# Altium PCB PCB1.PcbDoc
Units mil, origin at the board's own origin, x right, y up, seen from the top; angles counter-clockwise.
Board outline 6000 x 4000 mil, 2 copper layers (Top Layer, Bottom Layer); 21 components, 18 nets, 53 pads, 0 vias.
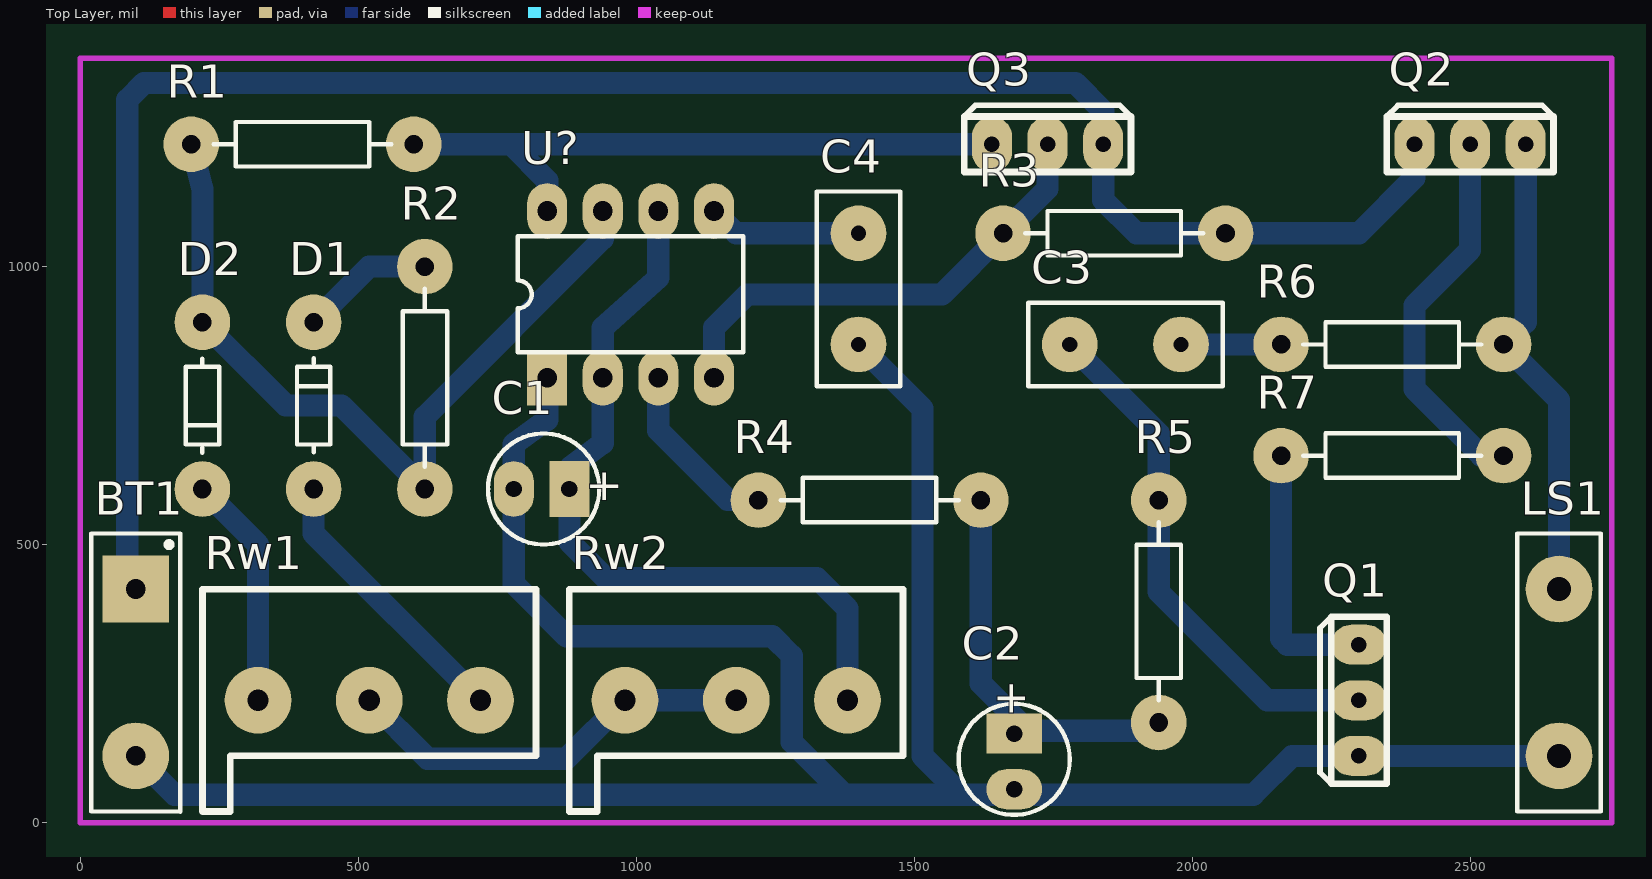
[diagram p0: Top Layer view]
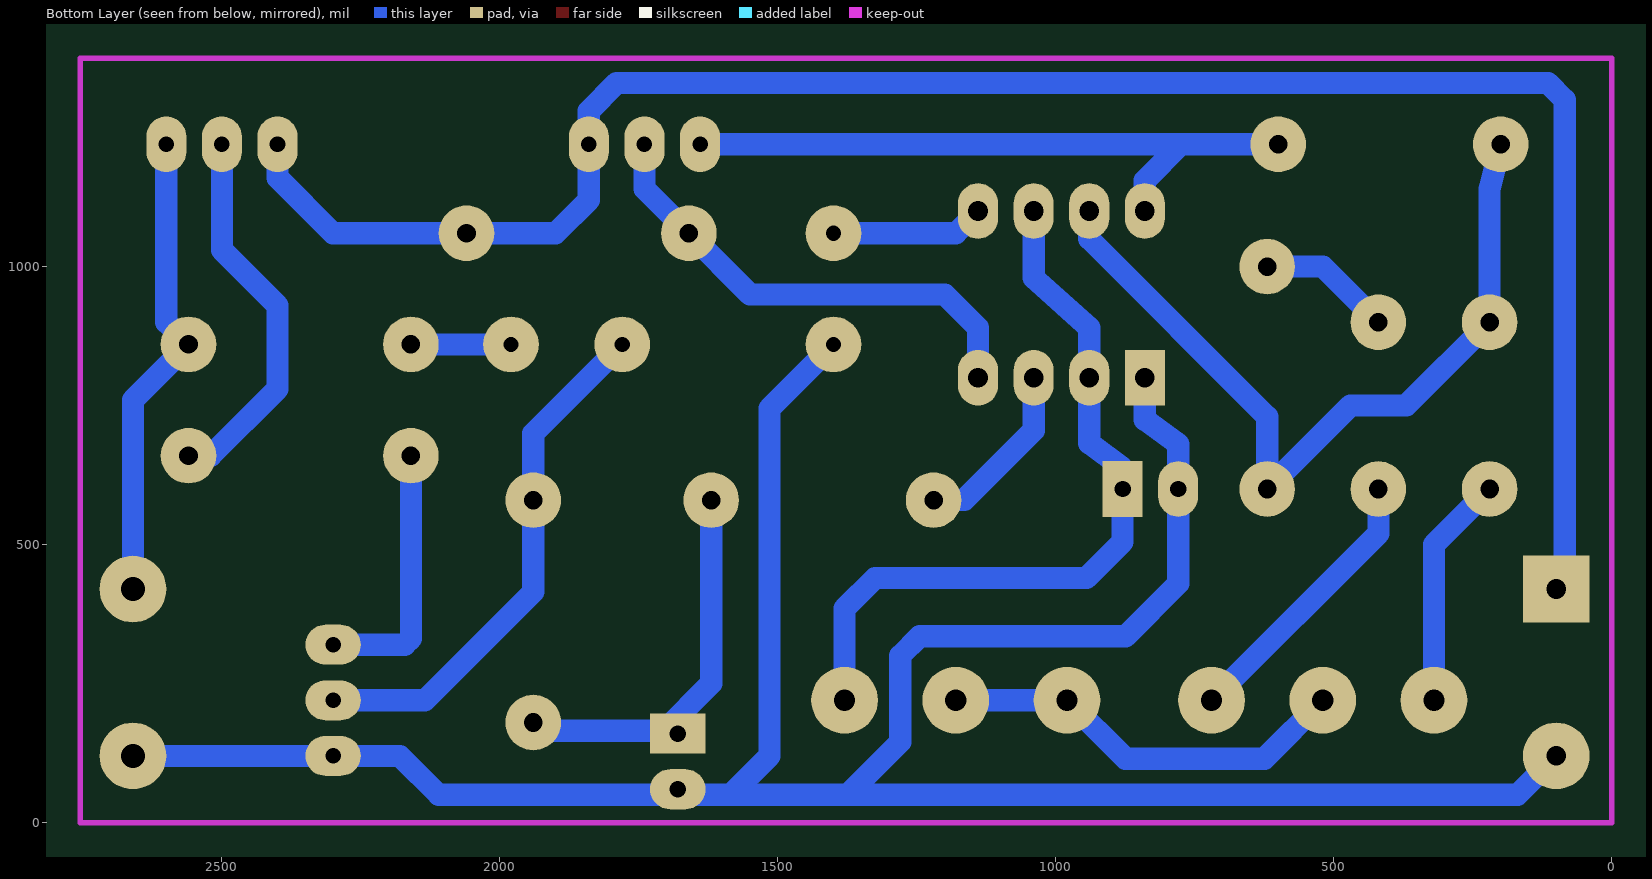
[diagram p1: Bottom Layer view, seen from below]

## Layer stack, top to bottom
Top Layer: signal copper 1.4
Dielectric: dielectric 12.6, FR-4, Dk 4.8
Bottom Layer: signal copper 1.4

## Board outline
-1100,-1295 4900,-1295 4900,2705 -1100,2705

## Design rules (kind name [scope] priority, off if disabled: settings)
Clearance [All] p1: gap=10
ComponentClearance [All] p1: gap=10 collisioncheckmode=3 verticalgap=10
PolygonConnect [All] p1: connectstyle=Relief reliefconductorwidth=10 reliefentries=4 polygonreliefangle="90 Angle"
RoomDefinition Sheet1 [InComponentClass('Sheet1')] p1: confinementstyle=ConfineIn formatcopy=TRUE lockcomponents=FALSE outline -555,-1105 4300,-1105 4300,-375 -555,-375
RoutingLayers [All] p1: top layer_v5=FALSE bottom layer_v5=TRUE
RoutingVias [All] p1: holewidth=28 width=50 viastyle="Through Hole" minholewidth=28 minwidth=50 maxholewidth=28 maxwidth=50
SolderMaskExpansion [All] p1: expansion=4
TestPointUsage [All] p1: valid=0 allowmultiple=FALSE
Testpoint [All] p1: side=15 testpointundercomponent=TRUE minsize=40 maxsize=100 preferedsize=60 minholesize=0 maxholesize=40 preferedholesize=32 testpointgrid=1 style=1023 order=0-112345678
Width [All] p1: maxlimit=50 minlimit=30 preferedwidth=40
17 further rules are at their usual default settings.

## Components (designator, comment, footprint, x,y, rotation, side; value= is the part's Value field where it differs from the comment)
BT1 "Battery" BAT-2-D 100,420 r270 top
C1 "C" RAD-0.1-D 880,600 r180 top
C2 "C" RAD-0.1-D 1680,160 r270 top
C3 "Cap" RAD-0.2-D 1980,860 r180 top
C4 "Cap" RAD-0.2-D 1400,860 r90 top
D1 "IN4148" DIODE-0.3-D 420,600 r90 top
D2 "IN4148" DIODE-0.3-D 220,900 r270 top
LS1 "Speaker" SPEAKER-D 2660,420 r270 top
Q1 "9013" TO-126-D 2300,120 r90 top
Q2 "9012" TO-126-D 2400,1220 r0 top
Q3 "9013" TO-126-D 1640,1220 r0 top
R1 "R0.25w" AXIAL-0.4-D 400,1220 r0 top
R2 "R0.25w" AXIAL-0.4-D 620,800 r90 top
R3 "R0.25w" AXIAL-0.4-D 1860,1060 r0 top
R4 "R0.25w" AXIAL-0.4-D 1420,580 r0 top
R5 "R0.25w" AXIAL-0.4-D 1940,380 r90 top
R6 "R0.25w" AXIAL-0.4-D 2360,860 r0 top
R7 "R0.25w" AXIAL-0.4-D 2360,660 r0 top
Rw1 "Rw" VR6-D 320,220 r0 top
Rw2 "Rw" VR6-D 980,220 r0 top
U? "555" DIP-8-D 840,800 r0 top

## Footprints (in the part's own frame and the unit in brackets; to place one, negate y for a bottom-side part, rotate by r counter-clockwise, add the part's x,y. Pads: shape width x height; smd on the part's side, far side on the other; paste and mask are expansions set on the pad)
AXIAL-0.4-D [mm] "Resistor; 2 Leads; 100*100mil"
  round 2.54 hole 0.85: 1(-5.08,0) 2(5.08,0)
  silkscreen extent -4.06,-1.02 4.06,1.02
BAT-2-D [mil] "power; 2 Leads; 120*120mil"
  rect 120x120 hole 35.43: 1(0,0)
  round 120 hole 35.43: 2(300,0)
  silkscreen extent -100,-80 400,80
DIODE-0.3-D [mm] "Resistor; 2 Leads; 100*100mil"
  round 2.54 hole 0.85: 1(0,0) 2(7.62,0)
  silkscreen extent 1.68,-0.76 5.97,0.76
DIP-8-D [mil] "DIP; 8 Leads; 100*72mil"
  rect 72x100 hole 35.43: 1(0,0)
  oval 72x100 hole 35.43: 2(100,0) 3(200,0) 4(300,0) 5(300,300) 6(200,300) 7(100,300) 8(0,300)
  silkscreen extent -53,46 353,254
RAD-0.1-D [mil] "Capacitor, Electrolytic, Radial; 72*100mil"
  rect 72x100 hole 29.53: 1(0,0)
  oval 72x100 hole 29.53: 2(100,0)
  silkscreen extent -54,-100 146,100
RAD-0.2-D [mm] "Jumper Wire; 2 Leads; 100*100mil"
  round 2.54 hole 0.7: 1(0,0) 2(5.08,0)
  silkscreen extent -1.91,-1.91 6.98,1.91
SPEAKER-D [mil] "Circuit Breaker; 2 Leads; 120*120mil"
  round 120 hole 43.31: 1(0,0) 2(300,0)
  silkscreen extent -100,-75 400,75
TO-126-D [mil] "72*100mil"
  oval 72x100 hole 28: 1(0,0) 2(100,0) 3(200,0)
  silkscreen extent -50,-50 250,70
VR6-D [mil] "120*120mil"
  round 120 hole 38: 1(0,0) 2(200,0) 3(400,0)
  silkscreen extent -100,-200 500,200

## Part data
BT1: "Multicell Battery"
C1 C2: "Electrolytic Capacitor"
C3 C4: "Capacitor"
D1 D2: "Default Diode"
LS1: "Loudspeaker"
Q1 Q3: "NPN Transistor"
R1 R2 R3 R4 R5 R6 R7: "Resistor"
Rw1 Rw2: "Potentiometer"
U?: library part NE555

## Nets (pads, with @x,y where several pads share a name; then routed paths per layer and width w, separated by ;. In a path a pad name is that pad's centre, name@x,y a point inside that pad or via, vN(x,y) a via of type N, cw(c..) or ccw(c..) an arc to the next point about the centre after c; other vN are vias at no path point)
GND: BT1.2 C1.2 C2.2 C4.1 LS1.2 Q1.1 U?.1 | length 4748.2
  Bottom Layer w40: BT1.2 170,50 2110,50 2180,120 LS1.2 ; U?.1 840,724.67 780,680.67 780,430 875,335 1245,335 1280,300 1280,145 1375,50 ; C4.1 1515,745 1515,120 1585,50
NetBT1_1: BT1.1 Q2.1 Q3.3 R3.2 | length 3520.6
  Bottom Layer w40: BT1.1 85,435 85,1300 115,1330 1790,1330 1840,1280 1840,1120 1900,1060 2300,1060 2400,1160 Q2.1
NetC1_1: C1.1 Rw2.3 U?.2 U?.6 | length 1384.2
  Bottom Layer w40: U?.6 1040,980 940,890 940,682.5 880,637.5 880,505 945,440 1325,440 1380,385 Rw2.3
NetC2_1: C2.1 R4.2 R5.1 | length 691.4
  Bottom Layer w40: R4.2 1620,250 1705,165 1925,165 R5.1
NetC3_1: C3.1 R6.1 | length 180
  Bottom Layer w40: C3.1 R6.1
NetC3_2: C3.2 Q1.2 R5.2 | length 952
  Bottom Layer w40: C3.2 1940,700 1940,415 2135,220 Q1.2
NetC4_2: C4.2 U?.5 | length 276.6
  Bottom Layer w40: U?.5 1180,1060 C4.2
NetD1_1: D1.1 Rw1.3 | length 504.3
  Bottom Layer w40: D1.1 420,520 Rw1.3
NetD1_2: D1.2 R2.2 | length 241.4
  Bottom Layer w40: D1.2 520,1000 R2.2
NetD2_1: D2.1 R1.1 R2.1 U?.7 | length 1479.3
  Bottom Layer w40: R1.1 220,1140 D2.1 370,750 470,750 R2.1 620,730 940,1050 U?.7
NetD2_2: D2.2 Rw1.1 | length 421.4
  Bottom Layer w40: D2.2 320,500 Rw1.1
NetLS1_1: LS1.1 Q2.3 R6.2 | length 858
  Bottom Layer w40: Q2.3 2600,900 R6.2 2660,760 LS1.1
NetQ1_3: Q1.3 R7.1 | length 473.6
  Bottom Layer w40: R7.1 2160,331 2171,320 Q1.3
NetQ2_2: Q2.2 R7.2 | length 691.1
  Bottom Layer w40: Q2.2 2500,1030 2400,930 2400,780 2520,660 R7.2
NetQ3_1: Q3.1 R1.2 U?.8 | length 1211.9
  Bottom Layer w40: R1.2 1145,1220 ; 775,1220 840,1155 U?.8 ; 1134,1220 Q3.1 Q3.1@1640,1234
NetQ3_2: Q3.2 R3.1 U?.4 | length 873.6
  Bottom Layer w40: U?.4 1140,890 1200,950 1550,950 R3.1 1740,1140 Q3.2
NetR4_1: R4.1 U?.3 | length 326.8
  Bottom Layer w40: U?.3 1040,705 1165,580 R4.1
NetRw1_2: Rw1.2 Rw2.1 Rw2.2 | length 747
  Bottom Layer w40: Rw1.2 625,115 875,115 Rw2.1 Rw2.2

## Keep-outs
Keep-Out Layer:
  lines w10: 0,0 0,1375 2755,1375 2755,0 0,0

## Text inside footprints (layer, text, board x,y; h text height)
C1: Top Overlay "+" at 976.81,629.53 h59.06 r180
C2: Top Overlay "+" at 1650.47,256.81 h59.06 r270